# EAGLE board sht21-breakout_v2 (EAGLE 7.2.0)
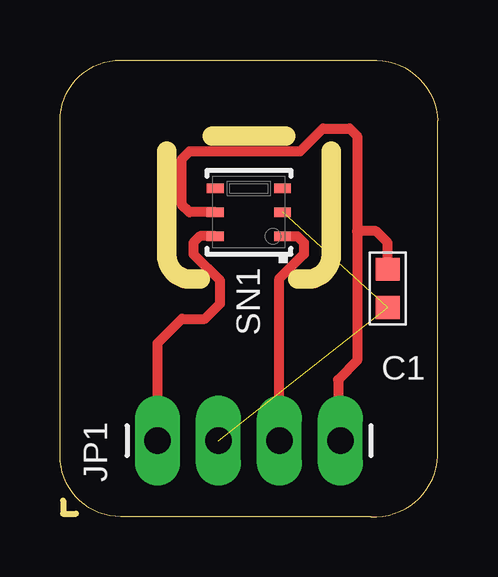
[diagram p0: board, top side]

Size 15.75 x 19.05 mm. Coordinates in mm from the lower left corner, seen from the top.
Outline: 2.54,19.05 12.95,19.05 arc-90 15.75,16.51 15.75,2.54 arc-90 12.95,0 2.54,0 arc-90 0,2.54 0,16.51 arc-90 2.54,19.05
Copper layers (1*16): Top 0.035mm / dielectric 1.5mm / Bottom 0.035mm
Design rules "default": minimum track width 10mil, minimum drill 24mil, track to track 8mil, track to pad 8mil, pad to pad 8mil, via to via 8mil, smd to smd 8mil, copper to edge 40mil, drill to drill 8mil, minimum pad ring 10mil, minimum via ring 8mil, stop-mask expansion 4mil, vias tented up to drill 0mil, thermal gap 10mil
Milling: 9 lines

## Footprints (pad centres in the part's own frame; a part is rotated, then mirrored left to right if it is on the bottom)
C0603-N = smd 0.95 x 1: 1 -0.8,0; 2 0.8,0
1X04_LONGPADS = drill 1.118 pad 1.88 long: 1 0,0; 2 2.54,0; 3 5.08,0; 4 7.62,0
DFN6/SHT = smd 0.4 x 0.7: 1 -1,-1.4; 2 0,-1.4; 3 1,-1.4; 4 1,1.4; 5 0,1.4; 6 -1,1.4

## Placement (x,y rotation side)
C1  [C0603-N]  13.65,9.53 90 top
JP1  [1X04_LONGPADS]  4.06,3.18 0 top
SN1  SHT21  [DFN6/SHT]  7.87,12.7 90 top

## Library data of the parts
C1 = passives-7351
JP1 = SparkFun-Connectors
SN1 = sensirion

## Nets
GND: C1.1 JP1.2 SN1.2
SCL: JP1.1 SN1.6
SDA: JP1.3 SN1.1
VCC: C1.2 JP1.4 SN1.5

## Tracks (layer width: path | path; a pad name or v marks a point on that pad's centre or on a via)
GND  (2 unrouted)
SCL
  Top 0.406: SN1.6 5.83,11.7 5.56,11.43 5.56,10.95 6.67,9.84 6.67,8.89 6.03,8.26 5.08,8.26 4.06,7.24 JP1.1
SDA
  Top 0.406: JP1.3 9.14,9.94 10.16,10.95 10.16,11.43 9.89,11.7 SN1.1
VCC
  Top 0.406: SN1.5 5.4,12.7 5.08,13.02 5.08,14.92 5.4,15.24 10,15.24 10.95,16.19 12.06,16.19 12.38,15.88 12.38,11.91 | 12.38,11.91 12.38,6.51 11.59,5.72 11.59,3.27 JP1.4 | C1.2 13.65,11.43 13.18,11.91 12.38,11.91